# EAGLE board layout4 (EAGLE 9.1.3)
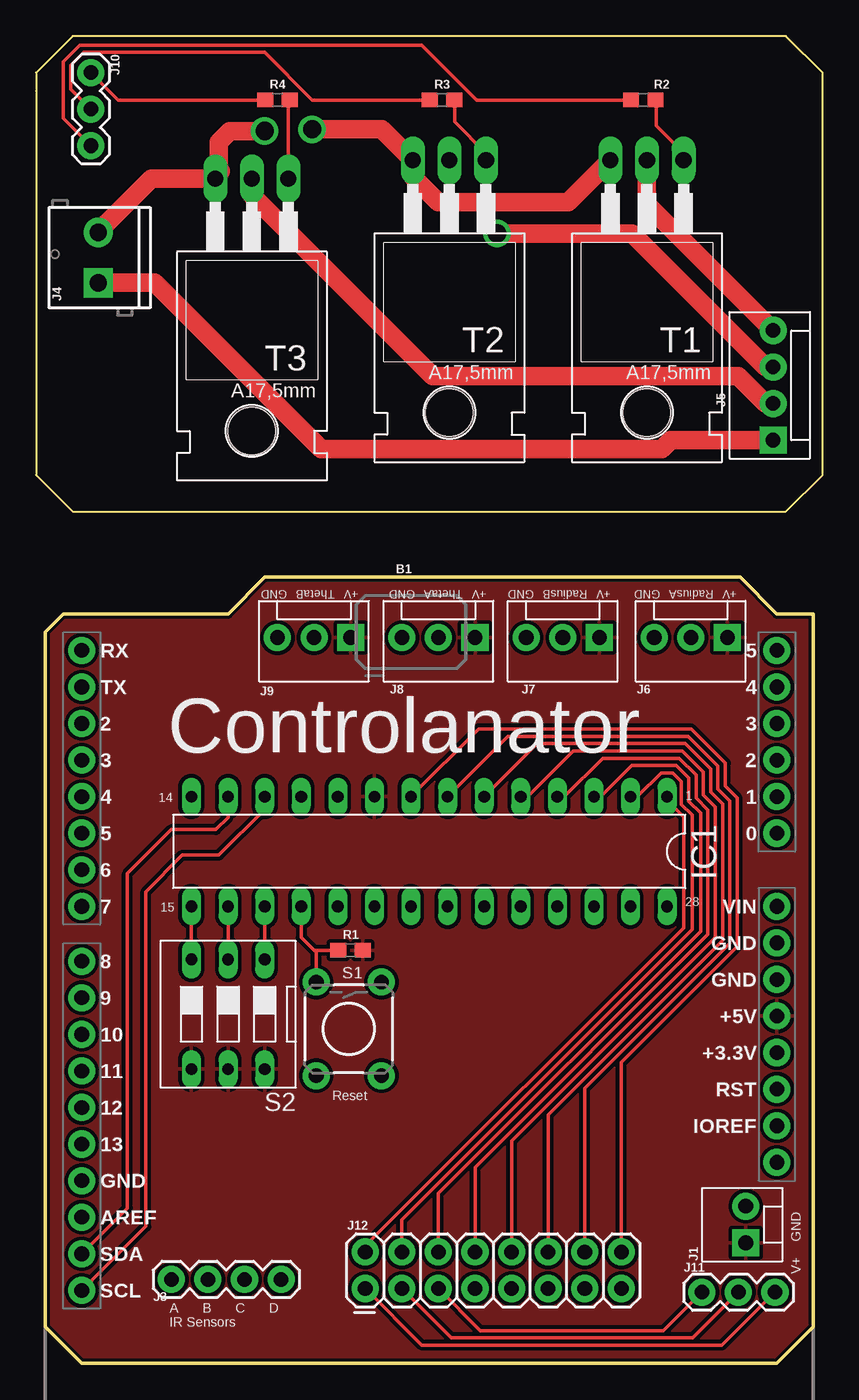
[diagram p0: board, top side]
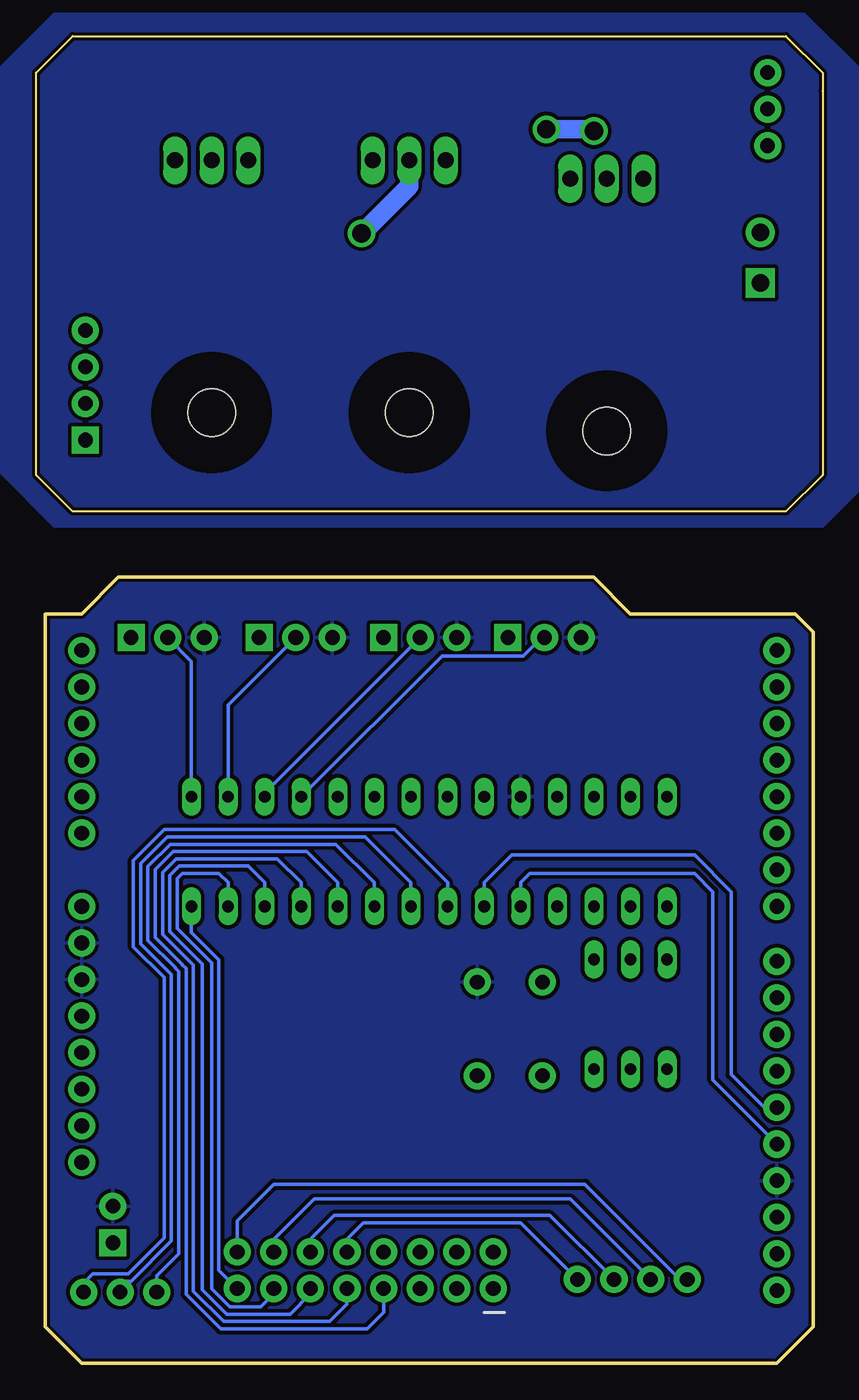
[diagram p1: board, bottom side, seen from below]

Size 54.61 x 92.2 mm. Coordinates in mm from the lower left corner, seen from the top.
Outline: 0,89.66 0,88.39
Outline: 0,88.39 0,61.72 2.54,59.18 52.07,59.18 54.61,61.72 54.61,89.66 52.07,92.2 2.54,92.2 0,89.66
Outline: 0,89.66 0,88.39
Outline: 0.64,50.8 1.91,52.07 13.34,52.07 15.88,54.61 48.9,54.61 51.44,52.07 53.98,52.07 53.98,2.54 51.44,0 3.17,0 0.64,2.54 0.64,50.8
Copper layers (1*16): Top 0.035mm / dielectric 1.5mm / Bottom 0.035mm
Design rules "layout3": minimum track width 10mil, minimum drill 20mil, track to track 10mil, track to pad 0.205mm, pad to pad 0.205mm, via to via 10mil, smd to smd 8mil, copper to edge 8mil, drill to drill 8mil, minimum pad ring 10mil, minimum via ring 10mil, stop-mask expansion 4mil, vias tented up to drill 25mil, thermal gap 10mil
Net classes: 1 logic: width 0.254 mm, drill 0.254 mm; 2 power: width 1.27 mm, drill 1.27 mm, clearance 0.508 mm

## Footprints (pad centres in the part's own frame; a part is rotated, then mirrored left to right if it is on the bottom)
UNO_R3_SHIELD = drill 1.016 pad 1.88: 3.3V 24.13,-2.54; 5V 24.13,0; A0 24.13,12.7; A1 24.13,15.24; A2 24.13,17.78; A3 24.13,20.32; A4 24.13,22.86; A5 24.13,25.4; AREF -24.13,-13.97; D2 -24.13,20.32; D3 -24.13,17.78; D4 -24.13,15.24; D5 -24.13,12.7; D6 -24.13,10.16; D7 -24.13,7.62; D8 -24.13,3.81; D9 -24.13,1.27; D10 -24.13,-1.27; D11 -24.13,-3.81; D12 -24.13,-6.35; D13 -24.13,-8.89; GND@0 24.13,2.54; GND@1 24.13,5.08; GND@2 -24.13,-11.43; IOREF 24.13,-7.62; NC 24.13,-10.16; RES 24.13,-5.08; RX -24.13,25.4; SCL -24.13,-19.05; SDA -24.13,-16.51; TX -24.13,22.86; VIN 24.13,7.62
DIL28-3 = drill 0.813 long: 1 -16.51,-3.81; 2 -13.97,-3.81; 3 -11.43,-3.81; 4 -8.89,-3.81; 5 -6.35,-3.81; 6 -3.81,-3.81; 7 -1.27,-3.81; 8 1.27,-3.81; 9 3.81,-3.81; 10 6.35,-3.81; 11 8.89,-3.81; 12 11.43,-3.81; 13 13.97,-3.81; 14 16.51,-3.81; 15 16.51,3.81; 16 13.97,3.81; 17 11.43,3.81; 18 8.89,3.81; 19 6.35,3.81; 20 3.81,3.81; 21 1.27,3.81; 22 -1.27,3.81; 23 -3.81,3.81; 24 -6.35,3.81; 25 -8.89,3.81; 26 -11.43,3.81; 27 -13.97,3.81; 28 -16.51,3.81
MOLEX-1X2 = drill 1.016 pad 1.88 square: 1 0,0 | drill 1.016 pad 1.88: 2 2.54,0
1X04 = drill 1.016 pad 1.88: 1 0,0; 2 2.54,0; 3 5.08,0; 4 7.62,0
SCREWTERMINAL-3.5MM-2 = drill 1.2 pad 2.032 square: 1 0,0 | drill 1.2 pad 2.032: 2 3.5,0
MOLEX-1X4 = drill 1.016 pad 1.88 square: 1 0,0 | drill 1.016 pad 1.88: 2 2.54,0; 3 5.08,0; 4 7.62,0
MOLEX-1X3 = drill 1.016 pad 1.88 square: 1 0,0 | drill 1.016 pad 1.88: 2 2.54,0; 3 5.08,0
1X03 = drill 1.016 pad 1.88: 1 0,0; 2 2.54,0; 3 5.08,0
2X8 = drill 1.016 pad 1.88: 1 0,0; 2 0,2.54; 3 2.54,0; 4 2.54,2.54; 5 5.08,0; 6 5.08,2.54; 7 7.62,0; 8 7.62,2.54; 9 10.16,0; 10 10.16,2.54; 11 12.7,0; 12 12.7,2.54; 13 15.24,0; 14 15.24,2.54; 15 17.78,0; 16 17.78,2.54
0603 = smd 1.1 x 1: 1 -0.85,0; 2 0.85,0
TACTILE_SWITCH_PTH_6.0MM = drill 1.016 pad 1.88: 1 -3.251,2.261; 2 3.251,2.261; 3 -3.251,-2.261; 4 3.251,-2.261
DS-03 = drill 0.813 long: 1 -2.54,-3.81; 2 0,-3.81; 3 2.54,-3.81; 4 2.54,3.81; 5 0,3.81; 6 -2.54,3.81
TO220 = drill 1.118 long: 1 -2.54,-6.35; 2 0,-6.35; 3 2.54,-6.35 | hole 3.302: 0,11.176

## Placement (x,y rotation side)
B1  ARDUINO_UNO_R3_SHIELDBASIC  [UNO_R3_SHIELD]  27.3,24.13 0 top
IC1  MCP23017SP  [DIL28-3]  27.3,35.56 180 top
J1  [MOLEX-1X2]  49.28,8.38 90 top
J3  [1X04]  9.4,5.84 0 top
J4  [SCREWTERMINAL-3.5MM-2]  4.32,75.06 90 top
J5  LED  [MOLEX-1X4]  51.18,64.13 90 top
J6  Radius A  [MOLEX-1X3]  48.01,50.42 180 top
J7  Radius B  [MOLEX-1X3]  39.12,50.42 180 top
J8  Theta A  [MOLEX-1X3]  30.48,50.42 180 top
J9  Theta B  [MOLEX-1X3]  21.84,50.42 180 top
J10  [1X03]  3.81,89.66 270 top
J11  [1X03]  46.23,4.95 0 top
J12  [2X8]  22.86,5.21 0 top
R1  10k  [0603]  21.84,28.7 0 top
R2  100  [0603]  42.16,87.76 0 top
R3  100  [0603]  28.19,87.76 0 top
R4  100  [0603]  16.76,87.76 0 top
S1  Reset  [TACTILE_SWITCH_PTH_6.0MM]  21.72,23.24 270 top
S2  [DS-03]  13.34,24.26 180 top
T1  200mA/40V  [TO220]  42.42,77.22 180 top
T2  200mA/40V  [TO220]  28.7,77.22 180 top
T3  200mA/40V  [TO220]  14.99,75.95 180 top

## Library data of the parts
B1 = SparkFun-Boards
IC1 = adafruit
J1 = SparkFun-Connectors; SF_ID: PRT-09918
J3 = SparkFun-Connectors; PROD_ID: CONN-09696
J4 = SparkFun-Connectors; PROD_ID: CONN-08399
J5 = SparkFun-Connectors; PROD_ID: CONN-08186; SF_ID: PRT-08231
J6-J9 = SparkFun-Connectors; PROD_ID: CONN-08625; SF_ID: PRT-08096
J10-J12 = SparkFun-Connectors
R1 = SparkFun-Resistors; PROD_ID: RES-00824
R2-R4 = SparkFun-Resistors; PROD_ID: RES-12438
S1 = SparkFun-Switches; PROD_ID: SWCH-08441; SF_SKU: COM-00097
S2 = switch-dil; OC_FARNELL: 1255223; OC_NEWARK: unknown
T1-T3 = transistor-neu-to92

## Nets
12V [power]: J4.1 J5.1
A0 [logic]: IC1.15 S2.3
A1 [logic]: IC1.16 S2.2
A2 [logic]: IC1.17 S2.1
GND [logic]: B1.GND@0 B1.GND@1 B1.GND@2 IC1.10 J1.2 J6.3 J7.3 J8.3 J9.3 S1.1
GPA0 [logic]: IC1.21 J11.3 J12.1
GPA1 [logic]: IC1.22 J11.2 J12.3
GPA2 [logic]: IC1.23 J11.1 J12.5
GPA3 [logic]: IC1.24 J12.7
GPA4 [logic]: IC1.25 J12.9
GPA5 [logic]: IC1.26 J12.11
GPA6 [logic]: IC1.27 J12.13
GPA7 [logic]: IC1.28 J12.15
GPB0 [logic]: IC1.1 J6.2 J12.2
GPB1 [logic]: IC1.2 J7.2 J12.4
GPB2 [logic]: IC1.3 J8.2 J12.6
GPB3 [logic]: IC1.4 J9.2 J12.8
GPB4 [logic]: IC1.5 J3.4 J12.10
GPB5 [logic]: IC1.6 J3.3 J12.12
GPB6 [logic]: IC1.7 J3.2 J12.14
GPB7 [logic]: IC1.8 J3.1 J12.16
INT_A [logic]: B1.D12 IC1.20
INT_B [logic]: B1.D13 IC1.19
N$1 [logic]: J10.2 R3.1
N$2 [logic]: R2.2 T1.1
N$3 [power]: J5.4 T1.2
N$4 [logic]: R3.2 T2.1
N$5 [power]: J5.3 T2.2
N$6 [logic]: R4.2 T3.1
N$7 [power]: J5.2 T3.2
N$8 [power]: J4.2 T1.3 T2.3 T3.3
N$9 [logic]: J10.3 R2.1
N$10 [logic]: J10.1 R4.1
RESET [logic]: IC1.18 R1.1 S1.3
SDA [logic]: B1.SDA IC1.13
SDL [logic]: B1.SCL IC1.12
VCC: B1.5V IC1.9 J1.1 J6.1 J7.1 J8.1 J9.1 R1.2 S2.4 S2.5 S2.6

## Tracks (layer width: path | path; a pad name or v marks a point on that pad's centre or on a via)
12V
  Top 1.27: J5.1 44.07,64.13 43.43,63.5 19.81,63.5 8.26,75.06 J4.1
A0
  Top 0.254: IC1.15 S2.3
A1
  Top 0.254: IC1.16 S2.2
A2
  Top 0.254: IC1.17 S2.1
GND
  pour Bottom: 0,-1.52 -1.27,-0.25 -1.27,54.36 0,55.63 0,56.9 50.8,56.9 57.15,50.55 57.15,-0.25 49.53,-7.87 6.35,-7.87
GND_12
  pour Bottom: -2.54,78.49 -2.54,60.71 0,58.17 10.16,58.17 53.34,58.17 57.15,61.98 57.15,89.92 53.34,93.73 1.27,93.73 -2.54,89.92 -2.54,88.65
GPA0
  Top 0.254: J12.1 26.8,1.27 47.62,1.27 J11.3
  Bottom 0.254: IC1.21 26.04,33.4 29.72,37.08 45.71,37.08 47.85,34.94 47.85,28.94 45.72,26.8 45.72,8.72 48.22,6.23 50.67,6.23 51.31,5.59 J11.3
GPA1
  Top 0.254: J12.3 28.83,1.78 45.59,1.78 J11.2
  Bottom 0.254: IC1.22 28.57,33.4 31.75,36.58 45.5,36.58 47.35,34.73 47.35,29.15 45.21,27.01 45.21,8.51 48,5.72 48.64,5.72 48.77,5.59 J11.2
GPA2
  Top 0.254: J11.1 43.56,2.29 30.86,2.29 J12.5
  Bottom 0.254: IC1.23 31.11,33.4 33.78,36.07 45.29,36.07 46.84,34.52 46.84,29.38 44.96,27.5 44.96,27.48 44.7,27.22 44.7,7.62 46.23,6.1 J11.1
GPA3
  Bottom 0.254: 34.29,2.41 41.8,2.41 44.2,4.81 44.2,27.43 44.45,27.69 44.45,27.71 46.33,29.6 46.33,34.31 45.08,35.56 35.81,35.56 33.66,33.4 IC1.24 | 34.29,2.41 | 34.29,2.41 31.62,2.41 30.48,3.56 J12.7
GPA4
  Bottom 0.254: IC1.25 36.2,33.4 37.85,35.05 44.87,35.05 45.82,34.1 45.82,29.81 43.69,27.67 43.69,5.02 41.59,2.92 34.23,2.92 33.02,4.13 J12.9
GPA5
  Bottom 0.254: IC1.26 38.73,33.4 39.88,34.54 44.66,34.54 45.31,33.89 45.31,30.02 43.05,27.75 43.05,5.1 41.38,3.43 36.96,3.43 35.56,4.83 J12.11
GPA6
  Bottom 0.254: IC1.27 41.27,33.4 41.91,34.04 44.45,34.04 44.81,33.68 44.81,30.23 42.42,27.84 42.42,5.19 41.17,3.93 38.99,3.93 38.1,4.83 J12.13
GPA7
  Bottom 0.254: J12.15 41.91,6.48 41.91,28.05 43.81,29.95 IC1.28
GPB0
  Top 0.254: IC1.1 43.81,39.12 44.96,37.97 44.96,30.26 22.86,8.16 J12.2
  Bottom 0.254: IC1.1 43.81,48.77 J6.2
GPB1
  Top 0.254: IC1.2 41.75,39.37 43.4,41.02 44.23,41.02 44.81,40.44 44.81,38.84 45.55,38.1 45.55,30.14 25.4,9.99 J12.4
  Bottom 0.254: IC1.2 41.27,45.72 J7.2
GPB2
  Top 0.254: IC1.3 39.21,39.37 41.37,41.53 44.44,41.53 45.31,40.65 45.31,39.05 46.14,38.23 46.14,30.01 27.94,11.81 J12.6
  Bottom 0.254: J8.2 38.73,39.62 IC1.3
GPB3
  Top 0.254: IC1.4 36.67,39.37 39.34,42.04 44.65,42.04 45.82,40.86 45.82,39.26 46.65,38.44 46.65,29.8 30.48,13.63 J12.8
  Bottom 0.254: IC1.4 26.42,49.15 20.77,49.15 19.5,50.42 J9.2
GPB4
  Top 0.254: IC1.5 34.13,39.37 37.31,42.55 44.86,42.55 46.33,41.07 46.33,39.47 47.16,38.65 47.16,29.59 33.02,15.45 J12.10
  Bottom 0.254: J3.4 20.96,9.78 31.88,9.78 33.02,8.64 J12.10
GPB5
  Top 0.254: IC1.6 34.8,43.06 45.07,43.06 46.84,41.28 46.84,39.68 47.66,38.86 47.66,29.38 35.56,17.27 J12.12
  Bottom 0.254: J3.3 18.93,10.29 33.91,10.29 35.56,8.64 J12.12
GPB6
  Top 0.254: IC1.7 32.77,43.56 45.28,43.56 47.35,41.49 47.35,39.89 48.17,39.07 48.17,29.17 38.1,19.09 J12.14
  Bottom 0.254: J3.2 17.53,11.43 35.31,11.43 38.1,8.64 J12.14
GPB7
  Top 0.254: IC1.8 30.74,44.07 45.49,44.07 47.85,41.7 47.85,40.11 48.68,39.28 48.68,28.96 40.64,20.92 J12.16
  Bottom 0.254: J3.1 9.91,5.84 16.51,12.45 38.1,12.45 40.64,9.91 J12.16
INT_A
  Bottom 0.254: IC1.20 23.5,33.4 21.59,35.31 8.89,35.31 6.35,32.77 6.35,20.07 4.06,17.78 B1.D12
INT_B
  Bottom 0.254: B1.D13 7.62,19.68 7.62,32.77 8.89,34.04 20.32,34.04 20.95,33.4 IC1.19
N$1
  Top 0.254: J10.2 2.41,88.52 2.41,90.17 3.3,91.06 15.88,91.06 19.18,87.76 27.3,87.76 R3.1
N$2
  Top 0.254: T1.1 44.96,84.07 43.05,85.98 43.05,87.76 R2.2
N$3
  Top 1.27: T1.2 42.42,80.52 J5.4
N$4
  Top 0.254: T2.1 31.24,84.07 29.08,86.23 29.08,87.76 R3.2
N$5  (via drill 1.27)
  Top 1.27: v32,78.49 41.4,78.49 50.67,69.21 J5.3
  Bottom 1.27: T2.2 28.7,81.79 v32,78.49
N$6
  Top 0.254: T3.1 17.53,87.76 R4.2
N$7
  Top 1.27: T3.2 14.99,81.15 27.56,68.58 48.77,68.58 50.67,66.67 J5.2
N$8  (via drill 1.27)
  Top 1.27: J4.2 4.32,78.61 8,82.3 T3.3 12.83,82.8 12.7,82.93 12.7,84.84 13.46,85.6 v15.88,85.6 | T1.3 36.96,80.64 27.94,80.64 26.16,82.42 T2.3 24,85.72 v19.18,85.72
  Bottom 1.27: v15.88,85.6 16,85.72 v19.18,85.72
N$9
  Top 0.254: J10.3 1.91,86.49 1.91,90.42 3.05,91.57 26.8,91.57 30.61,87.76 41.27,87.76 R2.1
N$10
  Top 0.254: J10.1 5.71,87.76 15.88,87.76 R4.1
RESET
  Top 0.254: IC1.18 18.41,29.59 19.3,28.7 | R1.1 19.3,28.7 | S1.3 19.46,28.55 19.3,28.7
SDA
  Top 0.254: B1.SDA 6.35,10.79 6.35,34.04 9.4,37.08 12.49,37.08 13.34,37.93 IC1.13
SDL
  Top 0.254: B1.SCL 7.62,9.52 7.62,32.77 10.16,35.31 12.7,35.31 15.88,38.48 IC1.12
VCC
  pour Top: 53.34,55.63 58.42,50.55 58.42,49.28 58.42,-2.79 57.15,-4.06 52.07,-9.14 48.26,-9.14 5.08,-9.14 2.54,-6.6 -2.54,-1.52 -2.54,54.52 2.54,55.63

## Text on the board
tPlace: +V ThetaB GND | +V ThetaA GND | +V RadiusB GND | +V RadiusA GND | Controlanator | 14 | 1 | 15 | 28 | Reset | V+ GND | A B C D / IR Sensors | +12V | +12V B R G